# Altium PCB Port Solar Panel.PcbDoc (part 1 of 2)
Units mm, origin at the board's own origin, x right, y up, seen from the top; angles counter-clockwise.
Board outline 327.5 x 87 mm, 2 copper layers (Top Layer, Bottom Layer), stack 1.58 mm thick; 63 components, 41 nets, 237 pads, 1893 vias.
Unrouted connection lines stored in the file: 33.
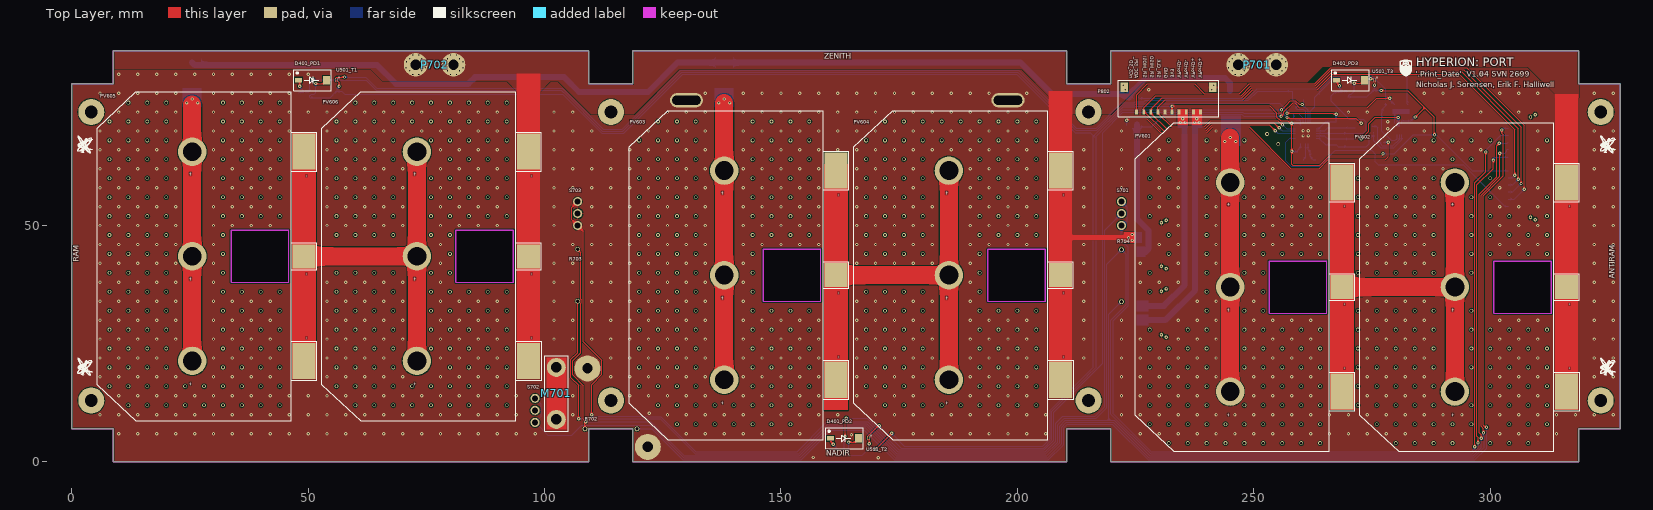
[diagram p0: Top Layer view]
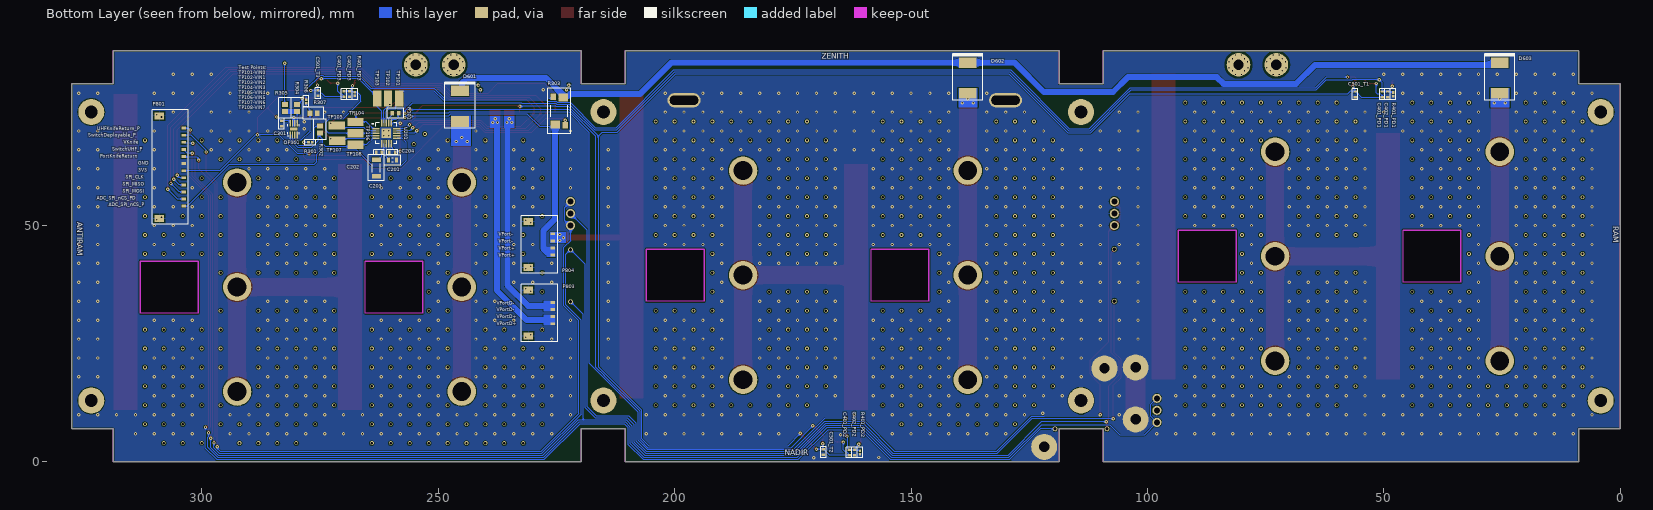
[diagram p1: Bottom Layer view, seen from below]
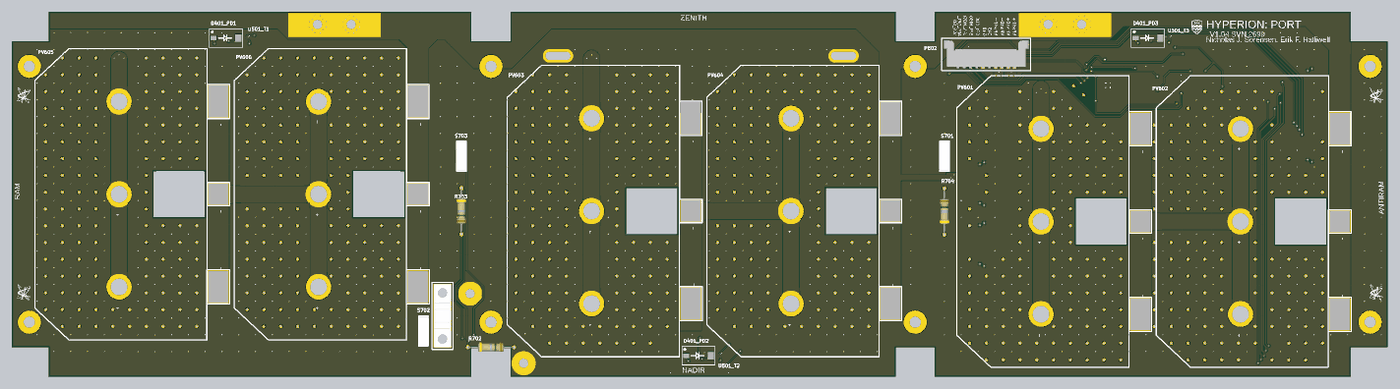
[diagram p3: 3D render of the assembled board from above, using the file's embedded part models]

## Layer stack, top to bottom
Top Solder: solder mask 0.0102, Solder Resist, Dk 3.5
Top Layer: signal copper 0.0356
Dielectric 1: dielectric 1.509, FR-4, Dk 4.8
Bottom Layer: signal copper 0.0356
Bottom Solder: solder mask 0.0102, Solder Resist, Dk 3.5

## Board outline
0,7 8.8,7 8.8,0 109.4,0 109.4,7 118.7,7 118.7,0 210.4,0 210.4,7 219.7,7 219.7,0 318.699,0 318.699,7 327.5,7 327.5,80 318.699,80 318.699,87 219.7,87 219.7,80 210.4,80 210.4,87 118.7,87 118.7,80 109.4,80 109.4,87 8.8,87 8.8,80 0,80
cut-out: 45.9,49 33.75,49 33.75,38 45.9,38
cut-out: 158.4,45 146.25,45 146.25,34 158.4,34
cut-out: 265.4,42.5 253.25,42.5 253.25,31.5 265.4,31.5
cut-out: 312.9,42.5 300.75,42.5 300.75,31.5 312.9,31.5
cut-out: 205.9,45 193.75,45 193.75,34 205.9,34
cut-out: 93.4,49 81.25,49 81.25,38 93.4,38

## Design rules (kind name [scope] priority, off if disabled: settings)
BoardOutlineClearance [All] p1: gap=0.254 ignorepadtopadclearanceinfootprint=FALSE
Clearance Clearance_1 [(InComponent('P701') OR InComponent('P702')) AND InNet('V-') vs InNet('GND')] p1: gap=0.5 ignorepadtopadclearanceinfootprint=FALSE
Clearance [All] p2: gap=0.178 ignorepadtopadclearanceinfootprint=FALSE
HoleSize [All] p1: absolutevalues=TRUE maxlimit=6 minlimit=0.2 maxpercent=80.000 minpercent=20.000
MinimumSolderMaskSliver [All] p1: minsoldermaskwidth=0.127
PlaneConnect [All] p1: planeconnectstyle=Direct reliefexpansion=0.508 reliefentries=4 reliefconductorwidth=0.254 reliefairgap=0.254
PolygonConnect [All] p1: connectstyle=Direct reliefconductorwidth=0.254 reliefentries=4 polygonreliefangle="90 Angle" airgapwidth=0.254
RoutingVias [All] p1: holewidth=0.33 width=0.711 viastyle="Through Hole" minholewidth=0.2 minwidth=0.4 maxholewidth=6 maxwidth=7
SilkToSilkClearance [All] p1: silktosilkclearance=0
SilkToSolderMaskClearance [IsPad] p1: minsilkscreentomaskgap=0.025 clearancetoexposedcopper=TRUE
SolderMaskExpansion [All] p1: expansion=0.102 istentingtop=FALSE
Width [All] p1: maxlimit=10.16 minlimit=0.203 preferedwidth=0.254
25 further rules are at their usual default settings.

## Classes and differential pairs
channel class Temp_Sensor: T1 T2 T3
channel class Photodiode_Sun_Sensor: PD1 PD2 PD3
component class T3: C501_T3 U501_T3
component class T2: C501_T2 U501_T2
component class T1: C501_T1 U501_T1
component class Port: R101 TP101 TP102 TP103 TP104 TP105 TP106 TP107 TP108
component class "Port Headers": P801 P802 P803 P804
component class PD3: C401_PD3 C402_PD3 D401_PD3 R401_PD3
component class PD2: C401_PD2 C402_PD2 D401_PD2 R401_PD2
component class PD1: C401_PD1 C402_PD1 D401_PD1 R401_PD1
component class "Mechanical Interfacing": M701 P701 P702 R702 R703 R704 S701 S702 S703
component class "Current and Voltage Sensors": C301 OP301 R301 R302 R303 R304 R305 R306 R307
component class "Photovoltaic Array": D601 D602 D603 PV601 PV602 PV603 PV604 PV605 PV606 Q101
net class VIN[0..7]: VIN0 VIN1 VIN2 VIN3 VIN4 VIN5 VIN6 VIN7
component class "U_AD7298 12-Bit SPI ADC": C201 C202 C203 C204 U201

## Components (designator, comment, footprint, x,y, rotation, side; value= is the part's Value field where it differs from the comment)
C201 "" TDK-CGA3E 259.65,63.85 r0 bottom value=1µF
C202 "" TDK-CGA2B 262.5,65.5 r0 bottom value=0.1µF
C203 "" TDK-CGA5L 263.05,62.175 r270 bottom value=10µF
C204 "" TDK-CGA2B 259.7,65.5 r0 bottom value=0.1µF
C301 "Cap" TDK-CGA2B 283.1,71.55 r90 bottom value=0.1µF
C401_PD1 "Cap" TDK-CGA2B 50.35,77.75 r270 bottom value=0.1µF (schematic designator C401)
C401_PD2 "Cap" TDK-CGA2B 163.1,2 r270 bottom value=0.1µF (schematic designator C401)
C401_PD3 "Cap" TDK-CGA2B 269.9,77.8 r270 bottom value=0.1µF (schematic designator C401)
C402_PD1 "Cap" TDK-CGA2B 49.2,77.75 r90 bottom value=100pF (schematic designator C402)
C402_PD2 "Cap" TDK-CGA2B 161.95,2 r90 bottom value=100pF (schematic designator C402)
C402_PD3 "Cap" TDK-CGA2B 268.75,77.8 r90 bottom value=100pF (schematic designator C402)
C501_T1 "Cap" TDK-CGA2B 56.1,77.75 r90 bottom value=0.1µF (schematic designator C501)
C501_T2 "Cap" TDK-CGA2B 168.55,2.1 r90 bottom value=0.1µF (schematic designator C501)
C501_T3 "Cap" TDK-CGA2B 275.4,78 r90 bottom value=0.1µF (schematic designator C501)
D401_PD1 "PDB-C160SMCT-ND" PDB-C160SM 48,80.75 r0 top (schematic designator D401)
D401_PD2 "PDB-C160SMCT-ND" PDB-C160SM 160.5,5 r0 top (schematic designator D401)
D401_PD3 "PDB-C160SMCT-ND" PDB-C160SM 267.5,80.75 r0 top (schematic designator D401)
D601 "MBRS410L" ONS-875 245.4,75.25 r90 bottom
D602 "MBRS410L" ONS-875 138,81.2 r90 bottom
D603 "MBRS410L" ONS-875 25.5,81.2 r90 bottom
M701 "Antenna_Saddle" ANTENNA_SADDLE 102.5,20 r270 top
OP301 "OPA2333" TI-DSG0008A 280.55,70.4 r90 bottom
P701 "Mounting_Hole" DEPHINGE_MOUNTING_HOLE_BODY 254.7,84 r180 top
P702 "Mounting_Hole" DEPHINGE_MOUNTING_HOLE_BODY 80.75,84 r180 top
P801 "WM16219CT-ND" MOLX-5040501291 303.8,62.35 r270 bottom
P802 "WM10138CT-ND" MOLX-5040501091 231.95,74 r180 top
P803 "WM10137CT-ND" MOLX-5040500491 225.75,31.5 r270 bottom
P804 "WM10137CT-ND" MOLX-5040500491 225.75,46 r270 bottom
PV601 "XTJPrime" "XTJ PRIME" 245,37 r270 top
PV602 "XTJPrime" "XTJ PRIME" 292.5,37 r270 top
PV603 "XTJPrime" "XTJ PRIME" 138,39.5 r270 top
PV604 "XTJPrime" "XTJ PRIME" 185.5,39.5 r270 top
PV605 "XTJPrime" "XTJ PRIME" 25.5,43.5 r270 top
PV606 "XTJPrime" "XTJ PRIME" 73,43.5 r270 top
R101 "Res3" VSH-0603MCT 259.012,73.75 r180 bottom value=10k
R301 "0.1% 1/16W" PANA-ERA2A 277.026,67.6 r180 bottom value=6.2k
R302 "0.1% 1/8W" PANA-ERA6A 274.973,70.325 r270 bottom value=1M
R303 "Res Sense" VSH-2512R4C 224.4,74.2 r270 bottom value=0.01
R304 "0.1% 1/8W" PANA-ERA6A 279.8,74.85 r270 bottom value=1M
R305 "0.1% 1/8W" PANA-ERA6A 282.4,74.85 r270 bottom value=845k
R306 "0.1% 1/16W" PANA-ERA2A 277.9,76.249 r270 bottom value=6.2k
R307 "0.1% 1/8W" PANA-ERA6A 276.337,73.75 r180 bottom value=1M
R401_PD1 "0.1% 1/16W" PANA-ERA2A 48.05,77.75 r90 bottom value=24k (schematic designator R401)
R401_PD2 "0.1% 1/16W" PANA-ERA2A 160.8,2 r90 bottom value=24k (schematic designator R401)
R401_PD3 "0.1% 1/16W" PANA-ERA2A 267.6,77.8 r90 bottom value=24k (schematic designator R401)
R702 "Res3" VSH-CPF1 119.55,7 r180 top value=21
R703 "Res3" VSH-CPF1 107,34 r90 top value=21
R704 "Res3" VSH-CPF1 222,44.9 r270 top value=21
S701 "AV4424" PANA-AV4424 222,55.08 r270 top
S702 "AV4424" PANA-AV4424 98,8.375 r90 top
S703 "AV4424" PANA-AV4424 107,55.08 r270 top
TP101 "5017" KS-5017#1 258.25,76.65 r270 bottom
TP102 "5017" KS-5017#2 260.6,76.65 r90 bottom
TP103 "5017" KS-5017#2 262.9,76.65 r90 bottom
TP104 "5017" KS-5017#3 267.45,71.9 r0 bottom
TP105 "5017" KS-5017#3 271.45,71.15 r0 bottom
TP106 "5017" KS-5017#3 267.45,69.5 r0 bottom
TP107 "5017" KS-5017#3 271.35,67.9 r0 bottom
TP108 "5017" KS-5017#3 267.45,67.1 r0 bottom
U201 "AD7298" ADI-CP-20-8 260.95,69.5 r180 bottom
U501_T1 "LMT70 / 296-47337-1-ND" TI-YFQ0004 56,80.8 r270 top (schematic designator U501)
U501_T2 "LMT70 / 296-47337-1-ND" TI-YFQ0004 168.5,5.05 r270 top (schematic designator U501)
U501_T3 "LMT70 / 296-47337-1-ND" TI-YFQ0004 275.5,80.8 r270 top (schematic designator U501)

## Footprints (in the part's own frame and the unit in brackets; to place one, negate y for a bottom-side part, rotate by r counter-clockwise, add the part's x,y. Pads: shape width x height; smd on the part's side, far side on the other; paste and mask are expansions set on the pad)
ADI-CP-20-8 [mm] "QFN, 20-Leads, Body 4.00x4.00mm, Pitch 0.50mm, Thermal Pad 2.55x2.55mm, IPC Low Density"
  rect 1.5x0.3 smd: 1(-2.2,1) 2(-2.2,0.5) 3(-2.2,0) 4(-2.2,-0.5) 5(-2.2,-1) 11(2.2,-1) 12(2.2,-0.5) 13(2.2,0) 14(2.2,0.5) 15(2.2,1)
  rect 0.3x1.5 smd: 6(-1,-2.2) 7(-0.5,-2.2) 8(0,-2.2) 9(0.5,-2.2) 10(1,-2.2) 16(1,2.2) 17(0.5,2.2) 18(0,2.2) 19(-0.5,2.2) 20(-1,2.2)
  rect 2x2 smd: 21(0,0)
  silkscreen extent -2.98,-2.2 2.2,2.2, body extent -2.07,-2.07 2.07,2.07, height 0.8
ANTENNA_SADDLE [mm] "Saddle for attaching antenna to panel"
  round 4 / inner round 4 / far side round 5.5 hole 2.2: 1(0,0) 1(11,0)
  Top Layer region: -2.125,-2.125 13.125,-2.125 13.125,2.125 -2.125,2.125
  silkscreen extent -2.5,-2.5 13.5,2.5, body extent -2,-2 13,2, height 7.29
DEPHINGE_MOUNTING_HOLE_BODY [mm]
  round 5 hole 2.2: 1(0,0) 1(8,0)
  Top Layer region: 3.2,-3.2
KS-5017#1 [mil] "Testpoint Lug Mini SMD 27X10X152"
  rect 135x70 smd: 1(-7.87,0)
  body extent -53,-20 53,20, height 60
KS-5017#2 [mil] "Testpoint Lug Mini SMD 27X10X152"
  rect 135x70 smd: 1(7.87,0)
  body extent -53,-20 53,20, height 60
KS-5017#3 [mil] "Testpoint Lug Mini SMD 27X10X152"
  rect 135x70 smd: 1(0,0)
  body extent -53,-20 53,20, height 60
MOLX-5040500491 [mm]
  rect 0.6x1 smd: 1(-2.25,0) 2(-0.75,0) 3(0.75,0) 4(2.25,0)
  oval 0.711x0.711 hole 0.33 mask+0.102: M1(-5.105,-5.7) M1(-4.605,-4.7) M2(4.605,-4.7) M2(5.105,-5.7)
  rect 1.5x2 smd: M1(-4.855,-5.2) M2(4.855,-5.2)
  silkscreen extent -6.1,-6.7 6.1,1, body extent -5.28,-6.05 5.27,0.39, height 2.01
MOLX-5040501091 [mm]
  rect 0.6x1 smd: 1(-6.75,0) 2(-5.25,0) 3(-3.75,0) 4(-2.25,0) 5(-0.75,0) 6(0.75,0) 7(2.25,0) 8(3.75,0) 9(5.25,0) 10(6.75,0)
  oval 0.711x0.711 hole 0.33 mask+0.102: M1(-9.605,-5.7) M1(-9.105,-4.7) M2(9.105,-4.7) M2(9.605,-5.7)
  rect 1.5x2 smd: M1(-9.355,-5.2) M2(9.355,-5.2)
  silkscreen extent -10.6,-6.7 10.6,1, body extent -9.78,-6.05 9.77,0.39, height 2.01
MOLX-5040501291 [mm]
  rect 0.6x1 smd: 1(-8.25,0) 2(-6.75,0) 3(-5.25,0) 4(-3.75,0) 5(-2.25,0) 6(-0.75,0) 7(0.75,0) 8(2.25,0) 9(3.75,0) 10(5.25,0) 11(6.75,0) 12(8.25,0)
  oval 0.711x0.711 hole 0.33 mask+0.102: M1(-11.105,-5.7) M1(-10.605,-4.7) M2(10.605,-4.7) M2(11.105,-5.7)
  rect 1.5x2 smd: M1(-10.855,-5.2) M2(10.855,-5.2)
  silkscreen extent -12.1,-6.7 12.1,1, body extent -11.28,-6.05 11.27,0.39, height 2.01
ONS-875 [mm]
  rect 2.25x3.79 smd: 1(-3.25,0) 2(3.25,0)
  silkscreen extent -4.7,-3.2 5.1,3.2, body extent -3.98,-2.95 3.97,2.95, height 2.32
PANA-AV4424 [mm]
  round 1.905 hole 1.27: 1(2.54,0) 2(0,0) 3(5.08,0)
  body extent -1.21,-1.25 6.29,1.25, height 5.81
PANA-ERA2A [mm] "Chip Resistor, 2-Leads, Body 1.00x0.52mm, IPC High Density"
  rect 0.548x0.5 smd: 1(-0.376,0) 2(0.376,0)
  silkscreen extent -1.15,-0.58 1.15,0.58, body extent -0.55,-0.3 0.55,0.3, height 0.4
PANA-ERA6A [mm] "Chip Resistor, 2-Leads, Body 2.00x1.25mm, IPC High Density"
  rect 1x1.25 smd: 1(-0.75,0) 2(0.75,0)
  silkscreen extent -2.15,-1.3 2.15,1.3, body extent -1.1,-0.67 1.1,0.67, height 0.6
PDB-C160SM [mm] "Photodiode"
  rect 1.45x1 smd: 1(0,0)
  rect 1.45x1.8 smd: 2(5.9,0)
  silkscreen extent -1,-2.2 6.9,2.2
TDK-CGA2B [mm] "Chip Capacitor, 2-Leads, Body 1.00x0.50mm, IPC Low Density"
  rect 0.52x0.72 smd: 1(-0.6,0) 2(0.6,0)
  silkscreen extent -1.15,-0.58 1.15,0.58, body extent -0.52,-0.28 0.53,0.27, height 0.5
TDK-CGA3E [mm] "Chip Capacitor, 2-Leads, Body 1.60x0.80mm, IPC Low Density"
  rect 0.65x1.05 smd: 1(-0.85,0) 2(0.85,0)
  silkscreen extent -1.7,-1.05 1.7,1.05, body extent -0.85,-0.45 0.85,0.45, height 0.8
TDK-CGA5L [mm] "Chip Capacitor, 2-Leads, Body 3.20x1.60mm, IPC Low Density"
  rect 0.95x1.9 smd: 1(-1.775,0) 2(1.775,0)
  silkscreen extent -2.75,-1.7 2.75,1.7, body extent -1.7,-0.9 1.7,0.9, height 1.6
TI-DSG0008A [mm] "SON, 8-Leads, Body 2.00x2.00mm, Pitch 0.50mm, Thermal Pad 1.60x0.69mm, IPC Low Density"
  rect 1.4x0.3 smd: 1(-1.245,0.75) 2(-1.245,0.25) 3(-1.245,-0.25) 4(-1.245,-0.75) 5(1.245,-0.75) 6(1.245,-0.25) 7(1.245,0.25) 8(1.245,0.75)
  rect 0.69x1.6 smd: 9(0,0)
  silkscreen extent -1.5,-1.2 1.05,1.25, body extent -1.05,-1.05 1.05,1.05, height 0.8
TI-YFQ0004 [mm] "BGA, 4-Leads, Body 0.88x0.88mmx0.68mm, Pitch 0.40mm"
  round 0.21 smd: A1(-0.2,0.2) A2(0.2,0.2) B1(-0.2,-0.2) B2(0.2,-0.2)
  silkscreen extent -0.59,0.5 -0.5,0.6, body extent -0.44,-0.44 0.44,0.44, height 0.67
VSH-0603MCT [mm] "Chip Resistor, 2-Leads, Body 1.55x0.85mm, IPC Low Density"
  rect 0.8x1.05 smd: 1(-0.7,0) 2(0.7,0)
  silkscreen extent -1.7,-1.05 1.7,1.05, body extent -0.8,-0.48 0.8,0.48, height 0.55
VSH-2512R4C [mm]
  rect 1.65x2.01 smd: 1(-2.855,0.835) 2(2.855,-0.835)
  rect 1.39x1.14 smd: 3(2.999,1.27) 4(-2.999,-1.27)
  silkscreen extent -4.8,-2.45 4.8,2.45
VSH-CPF1 [mm] "RESISTOR METAL FILM 1W 1.00K OHM"
  round 1 hole 0.7: 1(0,0) 2(11,0)
  body extent 0.25,-1.16 10.76,2.29, height 3.81
"XTJ PRIME" [mil] "Spectrolab Solar Cell"
  round 236.22 hole 157.48: 1(-870.5,0) 1(0,0) 1(870.5,0)
  rect 300x190 smd: 2(-870.5,930) 2(870.5,930)
  rect 200x190 smd: 2(0,930)
  silkscreen extent -1369,-790 1369,1038, body extent -1357,-778 1356,778, height 13

## Part data
C201: library part PC-TDK-02603, "CAP CER 1UF 25V X7R 0603", Manufacturer Part Number=CGA3E1X7R1E105K080AC, Supplier Part Number 1=445-6931-1-ND, Temperature Coefficient=X7R, Tolerance=±10%, Voltage - Rated=25V, Applications=Automotive, Index=2603, LatestRevisionDate=3/16/2016, LatestRevisionNote=..., PackageReference="0603 (1608 Metric)", Part Number=PC-TDK-02603, Published=3/16/2016, Publisher=AlbertaSat, Supplier 1=Digi-key, Supplier Link=http://www.digikey.ca/product-search/en?keywords=445-6931-1-ND
C202 C204 C401_PD1 C401_PD2 C401_PD3 C501_T1 C501_T2 C501_T3: library part PC-TDK-02259, "CAP CER 0.1UF 50V X7R 0402", Manufacturer Part Number=CGA2B3X7R1H104K050BB, Supplier Part Number 1=445-6899-1-ND, Temperature Coefficient=X7R, Tolerance=±10%, Voltage - Rated=50V, Applications=Automotive, Index=2259, LatestRevisionNote=..., PackageReference="0402 (1005 Metric)", Part Number=PC-TDK-02259, Publisher=AlbertaSat, Supplier 1=Digi-key, Supplier Link=http://www.digikey.ca/product-search/en?keywords=445-6899-1-ND
  C202 C204: LatestRevisionDate=3/16/2016, Published=3/16/2016
  C401_PD1 C401_PD2 C401_PD3 C501_T1 C501_T2 C501_T3: LatestRevisionDate=2016-03-16, PackageDescription="Radial Cap, Thru-Hole; 2 Leads; 0.3 in Pin Spacing", Published=2016-03-16
C203: library part PC-TDK-02917, "CAP CER 10UF 25V X7R 1206", Manufacturer Part Number=CGA5L1X7R1E106K160AC, Supplier Part Number 1=445-6990-1-ND, Temperature Coefficient=X7R, Tolerance=±10%, Voltage - Rated=25V, Applications=Automotive, Index=2917, LatestRevisionDate=3/16/2016, LatestRevisionNote=..., PackageReference="1206 (3216 Metric)", Part Number=PC-TDK-02917, Published=3/16/2016, Publisher=AlbertaSat, Supplier 1=Digi-key, Supplier Link=http://www.digikey.ca/product-search/en?keywords=445-6990-1-ND
C301: library part PC-TDK-02255, "CAP CER 0.1UF 35V X7R 0402", Manufacturer Part Number=CGA2B3X7R1V104K050BB, Supplier Part Number 1=445-6901-1-ND, Temperature Coefficient=X7R, Tolerance=±10%, Voltage - Rated=35V, Applications=Automotive, Index=2255, LatestRevisionDate=2016-03-16, LatestRevisionNote=..., PackageDescription="Radial Cap, Thru-Hole; 2 Leads; 0.3 in Pin Spacing", PackageReference="0402 (1005 Metric)", Part Number=PC-TDK-02255, Published=2016-03-16, Publisher=AlbertaSat, Supplier 1=Digi-key, Supplier Link=http://www.digikey.ca/product-search/en?keywords=445-6901-1-ND
C402_PD1 C402_PD2 C402_PD3: library part PC-TDK-01227, "CAP CER 100PF 50V C0G 0402", Manufacturer Part Number=CGA2B2C0G1H101J050BA, Supplier Part Number 1=445-5596-1-ND, Temperature Coefficient=NP0, Tolerance=±5%, Voltage - Rated=50V, Applications=Automotive, Index=1227, LatestRevisionDate=2016-03-16, LatestRevisionNote=..., PackageDescription="Radial Cap, Thru-Hole; 2 Leads; 0.3 in Pin Spacing", PackageReference="0402 (1005 Metric)", Part Number=PC-TDK-01227, Published=2016-03-16, Publisher=AlbertaSat, Supplier 1=Digi-key, Supplier Link=http://www.digikey.ca/product-search/en?keywords=445-5596-1-ND
D401_PD1 D401_PD2 D401_PD3: library part PXX-ADP-00000, "SENSOR PHOTODIODE 850NM 2SMD GW", Manufacturer Part Number="Advanced Photonics", Index=1, LatestRevisionDate=3/28/2020, LatestRevisionNote=..., PackageReference=PIN2, Part Number=PXX-ADP-00000, Published=3/28/2020, Publisher=AlbertaSat, Supplier 1=Digi-key, Supplier Part Number 1=PDB-C160SMCT-ND
D601 D602 D603: library part PXX-ONS-00003, "SCHOTTKY BARRIER / RECTIFIERS / 4.0 AMPERES, 10 VOLTS, V_F = 0.31V", Supplier Part Number 1=MBRS410LT3-D, Code_JEDEC=DO-214-AA, Index=3, LatestRevisionDate=1/18/2020, LatestRevisionNote=..., Manufacturer Part Number=MBRS410L, PackageDescription="DO-214-AA/SMB; 2 C-Bend Leads; Body 5.3 x 3.6 mm, inc. leads (LxW)", PackageReference=SMB, Part Number=PXX-ONS-00003, Published=1/18/2020, Publisher=AlbertaSat, Supplier 1=Digi-key, Supplier Link=#https://www.digikey.com/product-detail/en/on-semiconductor/MBRS410LT3G/MBRS410LT3GOSCT-ND/1967073#
M701: library part PXX-ABS-00001, Manufacturer Part Number=Custom, Index=1, LatestRevisionNote=..., Part Number=PXX-ABS-00001, Publisher=AlbertaSat, Supplier 1=Digi-key
OP301: library part 73, "CMOS Amplifier 2 Circuit Rail-to-Rail 8-WSON (2x2)", Manufacturer Part Number=OPA2333PIDSGR, Operating Temperature="-55°C ~ 150°C", Supplier Part Number 1=296-51501-1-ND, Voltage - Supply="1.8V ~ 5.5V, ±0.9V ~ 2.75V", PackageReference="8-WFDFN Exposed Pad", Part Number=73, Supplier 1=Digi-Key, Supplier 2=Mouser, Supplier Link=#https://www.digikey.ca/product-detail/en/texas-instruments/OPA2333PIDSGR/296-51501-1-ND/9745865#, Supplier Part Number 2=595-OPA2333PIDSGR
P701 P702: library part PXX-ABS-00004, Manufacturer Part Number=Custom, Index=4, LatestRevisionNote=..., Part Number=PXX-ABS-00004, Publisher=AlbertaSat, Supplier 1=Digi-key
P801: library part 71, "CONN HEADER SMD R/A 12POS 1.5MM", Manufacturer Part Number=5040501291, LatestRevisionDate=17-Jul-2002, LatestRevisionNote="Re-released for DXP Platform.", Part Number=71, Publisher="Altium Limited", Supplier 1=Digi-Key, Supplier Link=#https://www.digikey.ca/product-detail/en/molex/5040501291/WM16219CT-ND/6702294#, Supplier Part Number 1=WM16219CT-ND
P802: library part 69, "CONN HEADER SMD R/A 10POS 1.5MM", Manufacturer Part Number=5040501091, LatestRevisionDate=17-Jul-2002, LatestRevisionNote="Re-released for DXP Platform.", Part Number=69, Publisher="Altium Limited", Supplier 1=Digi-Key, Supplier Link=#https://www.digikey.ca/product-detail/en/molex/5040501091/WM10138CT-ND/4357655#, Supplier Part Number 1=WM10138CT-ND
P803 P804: library part 63, "CONN HEADER SMD R/A 4POS 1.5MM", Manufacturer Part Number=5040500491, LatestRevisionDate=17-Jul-2002, LatestRevisionNote="Re-released for DXP Platform.", Part Number=63, Publisher="Altium Limited", Supplier 1=Digi-Key, Supplier Link=#https://www.digikey.ca/product-detail/en/molex/5040500491/WM10137CT-ND/4357653#, Supplier Part Number 1=WM10137CT-ND
PV601 PV602 PV603 PV604 PV605 PV606: library part PBT-SPEC-00002, Manufacturer Part Number=Spectrolab, Supplier Part Number 1="UTJ CIC 26.26cm^2", Index=2, LatestRevisionNote=..., PackageReference="3-Connector Solar Cell", Part Number=PBT-SPEC-00002, Publisher=AlbertaSat, Supplier 1=Spectrolab
R101: library part PR-VSH-00143, "RES SMD 10K OHM 1% 1/8W 0603", Manufacturer Part Number=MCT06030C1002FP500, Power - Rated=1/8W, Supplier Part Number 1=MCT0603-10.0K-CFCT-ND, Temperature Coefficient=±50ppm/°C, Tolerance=±1%, Applications="General Purpose", Index=143, LatestRevisionDate=3/14/2016, LatestRevisionNote=..., PackageDescription="Chip Resistor, 2-Leads, Body 1.55x0.85mm, IPC Low Density", PackageReference="0603 (1608 Metric)", Part Number=PR-VSH-00143, Published=3/14/2016, Publisher=AlbertaSat, Supplier 1=Digi-key, Supplier Link=http://www.digikey.ca/product-search/en?keywords=MCT0603-10.0K-CFCT-ND
R301 R306: library part 16853, "RES SMD 6.2K OHM 0.1% 1/16W 0402", Manufacturer Part Number=ERA-2APB622X, Power="0.063W, 1/16W", Supplier Part Number 1=P6.2KCNCT-ND, Temperature Coefficient=±15ppm/°C, Tolerance=±0.1%, LatestRevisionDate=29-May-2009, LatestRevisionNote="IPC-7351 Footprint Added.", PackageDescription="Chip Resistor, 2-Leads, Body 1.00x0.50mm, IPC Low Density", PackageReference="0402 (1005 Metric)", Part Number=16853, Published=8-Jun-2000, Publisher="Altium Limited", Supplier 1=Digi-Key, Supplier Link=http://www.digikey.ca/product-search/en?keywords=P6.2KCNCT-ND
R302 R304 R307: library part 19706, "RES SMD 1M OHM 0.1% 1/8W 0805", Manufacturer Part Number=ERA-6AEB105V, Power="0.125W, 1/8W", Supplier Part Number 1=P1MDACT-ND, Temperature Coefficient=±25ppm/°C, Tolerance=±0.1%, LatestRevisionDate=29-May-2009, LatestRevisionNote="IPC-7351 Footprint Added.", PackageDescription="Chip Resistor, 2-Leads, Body 2.00x1.25mm, IPC Low Density", PackageReference="0805 (2012 Metric)", Part Number=19706, Published=8-Jun-2000, Publisher="Altium Limited", Supplier 1=Digi-Key, Supplier Link=http://www.digikey.ca/product-search/en?keywords=P1MDACT-ND
R303: library part PR-VSH-00237, "RES SMD 0.01 OHM 0.1% 1W 2512", Manufacturer Part Number=Y14870R01000B9W, Power - Rated=1W, Supplier Part Number 1=Y1487-.01-ND, Temperature Coefficient=±15ppm/°C, Tolerance=±0.1%, Applications=Automotive, Index=237, LatestRevisionDate=2017-07-12, LatestRevisionNote=..., PackageReference=VSH-2512R4C, Part Number=PR-VSH-00237, Published=2017-07-12, Publisher=AlbertaSat, Supplier 1=Digi-key, Supplier Link=http://www.digikey.ca/product-search/en?keywords=Y1487-.01-ND
R305: library part 19643, "RES SMD 845K OHM 0.1% 1/8W 0805", Manufacturer Part Number=ERA-6AEB8453V, Power="0.125W, 1/8W", Supplier Part Number 1=P845KDACT-ND, Temperature Coefficient=±25ppm/°C, Tolerance=±0.1%, LatestRevisionDate=29-May-2009, LatestRevisionNote="IPC-7351 Footprint Added.", PackageDescription="Chip Resistor, 2-Leads, Body 2.00x1.25mm, IPC Low Density", PackageReference="0805 (2012 Metric)", Part Number=19643, Published=8-Jun-2000, Publisher="Altium Limited", Supplier 1=Digi-Key, Supplier Link=http://www.digikey.ca/product-search/en?keywords=P845KDACT-ND
R401_PD1 R401_PD2 R401_PD3: library part 17830, "RES SMD 24K OHM 0.1% 1/16W 0402", Manufacturer Part Number=ERA-2APB243X, Power="0.063W, 1/16W", Supplier Part Number 1=P24KCNCT-ND, Temperature Coefficient=±15ppm/°C, Tolerance=±0.1%, LatestRevisionDate=29-May-2009, LatestRevisionNote="IPC-7351 Footprint Added.", PackageDescription="Chip Resistor, 2-Leads, Body 1.00x0.50mm, IPC Low Density", PackageReference="0402 (1005 Metric)", Part Number=17830, Published=8-Jun-2000, Publisher="Altium Limited", Supplier 1=Digi-Key, Supplier Link=http://www.digikey.ca/product-search/en?keywords=P24KCNCT-ND
R702 R703 R704: library part PR-VSH-00317, "21 Ohms ±1% 1W Through Hole Resistor Axial Flame Proof, Moisture Resistant, Safety Metal Film", Manufacturer Part Number=CPF121R000FKEE6, Power - Rated=1W, Supplier Part Number 1=CPF21.0CCT-ND, Temperature Coefficient=±100ppm/°C, Tolerance=±1%, Index=317, LatestRevisionDate=2/27/2020, LatestRevisionNote=..., PackageDescription="Chip Resistor", PackageReference=VSH-CPF1, Part Number=PR-VSH-00317, Published=2/27/2020, Publisher=AlbertaSat, Supplier 1=Digi-key, Supplier Link=#https://www.digikey.ca/product-detail/en/vishay-dale/CPF121R000FKEE6/CPF21.0CCT-ND/2713126#
S701 S702 S703: library part 20035, "SWITCH SNAP ACT SPDT 500MA 30V", Supplier Part Number 1=255-3743-ND, Manufacturer Part Number=AV4424, Part Number=20035, Supplier 1=Digi-Key, Supplier Link=#https://www.digikey.com/product-detail/en/panasonic-electric-works/AV4424/255-3743-ND/646766#
TP101 TP102 TP103 TP104 TP105 TP106 TP107 TP108: library part PTP-KS-00001, "PC TEST POINT MINI SMD", Supplier Part Number 1=36-5017CT-ND, Index=1, LatestRevisionDate=3/15/2016, LatestRevisionNote=..., Manufacturer Part Number=5017, PackageDescription="Testpoint Lug Mini SMD 27X10X152", PackageReference=KS-5017, Part Number=PTP-KS-00001, Published=3/15/2016, Publisher=AlbertaSat, Supplier 1=Digi-key, Supplier 2=Newark, Supplier 3=Mouser, Supplier Link=http://www.digikey.ca/product-detail/en/keystone-electronics/5017/36-5017TR-ND/2217304
U201: library part PU-ADI-00007, "IC ADC 12BIT SAR 20LFCSP-WQ", Manufacturer Part Number=AD7298BCPZ, Supplier Part Number 1=AD7298BCPZ-ND, Index=7, LatestRevisionDate=7/16/2019, LatestRevisionNote=..., PackageDescription="QFN, 20-Leads, Body 4.00x4.00mm, Pitch 0.50mm, Thermal Pad 2.55x2.55mm, IPC Low Density", PackageReference="20-WFQFN Exposed Pad", Part Number=PU-ADI-00007, Published=7/16/2019, Publisher=AlbertaSat, Supplier 1=Digi-key, Supplier 2=Mouser, Supplier Link=#https://www.digikey.ca/product-detail/en/analog-devices-inc/AD7298BCPZ/AD7298BCPZ-ND/2507320#, Supplier Part Number 2=584-AD7298BCPZ
U501_T1 U501_T2 U501_T3: library part 70, "Temperature Sensor Analog, Local -55°C ~ 150°C 5.194mV/°C 4-DSBGA (0.81x0.81)", Manufacturer Part Number=LMT70YFQR, Operating Temperature="-55°C ~ 150°C", Supplier Part Number 1=296-47337-1-ND, PackageReference="BGA, 4-Leads, Body 0.88x0.88mmx0.68mm, Pitch 0.40mm", Part Number=70, Supplier 1=Digi-Key, Supplier Link=#https://www.digikey.ca/product-detail/en/texas-instruments/LMT70YFQR/296-47337-1-ND/7688347#

## Free pads (board coordinates)
  round 5.5 hole 2.2: 3(109.089,19.8) 3(121.838,3.2)
  oval 7x3 hole 2 slot 6 at 0 deg: 5(130,76.5) 5(198,76.5)
  round 5.5 hole 2.7: CHASSIS(4.15,13) CHASSIS(4.15,74) CHASSIS(114.05,13) CHASSIS(114.05,74) CHASSIS(215.05,13) CHASSIS(215.05,74) CHASSIS(323.35,13) CHASSIS(323.35,74)

## Via types
v1: diameter 0.711, hole 0.3, Top Layer to Bottom Layer, tented both sides, 1084 vias
v2: diameter 0.8, hole 0.5, Top Layer to Bottom Layer, 761 vias
v3: diameter 0.655, hole 0.25, Top Layer to Bottom Layer, 48 vias

## Nets (pads, with @x,y where several pads share a name; then routed paths per layer and width w, separated by ;. In a path a pad name is that pad's centre, name@x,y a point inside that pad or via, vN(x,y) a via of type N, cw(c..) or ccw(c..) an arc to the next point about the centre after c; other vN are vias at no path point)
3V3: C204.1 C301.2 C401_PD1.2 C401_PD2.2 C401_PD3.2 C501_T1.2 C501_T2.2 C501_T3.2 D401_PD1.2 D401_PD2.2 D401_PD3.2 OP301.8 P801.7 P802.5 R101.2 U201.10 U201.16 U501_T1.A2 U501_T1.B2 U501_T2.A2 U501_T2.B2 U501_T3.A2 U501_T3.B2 | length 471.6
  Top Layer w0.203: U501_T1.B2@55.8,80.6 U501_T1.A2@56.2,80.6 ; U501_T1.A2@56.2,80.59 56.55,80.24 v1(56.55,79.45) ; U501_T2.B2@168.3,4.85 U501_T2.A2@168.7,4.85 U501_T2.A2@168.7,4.85 168.699,3.899 v1(168.65,3.85) ; v1(271.2,80.1) 272.777,80.1 273.4,80.723 D401_PD3.2@273.4,80.75 ; U501_T3.B2@275.3,80.6 U501_T3.A2@275.7,80.6 275.7,79.987 275.5,79.787 v1(275.5,79.65)
  Top Layer w0.254: v1(51.6,80.05) 51.673,79.977 53.302,79.977 53.9,80.575 D401_PD1.2@53.9,80.75 ; v1(164.3,4.217) 164.31,4.227 165.802,4.227 166.4,4.825 D401_PD2.2@166.4,5 ; v1(170,2.7) 170.05,2.7 v1(173.4,6.05) ; P802.5@232.7,74 v1(232.7,75.2) ; v1(258,71.6) v1@258,71.55 ; v1(276.9,78.55) 282.55,78.55 286.15,74.95 ; v1(277.3,65.2) 277.3,65.076 277.133,64.909 277.133,64.833 277.05,64.75 265.925,64.75 263.975,62.8 258.199,62.8 258.05,62.949 v1(258.05,65.75) 257.9,65.9 258,66 v1@258,71.55 ; v1(284.15,72.95) 286.15,74.95 ; v1(288.2,69.213) 288.15,69.263 288.15,72.95 286.15,74.95 ; v1(232.7,75.2) 232.7,75.3 v1(232.7,75.2) ; v1(232.7,75.2) 232.8,75.3 253.35,75.3 254.85,73.8 254.85,72.95 255.168,72.632 255.284,72.632 255.726,72.19 257.16,72.19 257.8,71.55 v1@258,71.55
  Bottom Layer w0.203: C501_T2.2@168.55,2.7 168.65,2.8 v1(168.65,3.85)
  Bottom Layer w0.254: v1(51.6,80.05) 51.6,78.126 51.259,77.785 50.635,77.785 50.4,77.55 50.4,77.2 C401_PD1.2@50.35,77.15 50.45,77.05 54.7,77.05 56,78.35 C501_T1.2@56.1,78.35 ; v1(56.55,79.45) 56.55,79.326 56.215,78.991 56.215,78.465 C501_T1.2@56.1,78.35 ; C401_PD2.2@163.1,1.4 C401_PD2.2@163.117,1.4 ; v1(164.3,4.217) 164.3,2.55 163.785,2.035 163.485,2.035 163.25,1.8 163.25,1.533 C401_PD2.2@163.117,1.4 ; v1(170,2.7) C501_T2.2@168.55,2.7 168.45,2.7 167.15,1.4 C401_PD2.2@163.117,1.4 ; v1(173.4,6.05) 176.097,3.353 205.346,3.353 206.894,4.9 206.894,10.912 214.974,18.992 214.978,18.992 cw(c218.476,15.257) 215.12,19.121 215.127,19.127 216.077,20.077 216.077,68.846 ; v1(232.7,75.2) 225.321,75.2 225.221,75.3 225.033,75.112 222.343,75.112 216.077,68.846 ; v1(258,71.6) 259.648,71.6 259.948,71.3 259.95,71.302 U201.16@259.95,71.7 259.95,72.3 259.927,72.323 258.977,72.323 258.457,72.843 258.457,73.41 R101.2@258.267,73.6 ; v1(258.05,65.75) 258.137,65.663 258.967,65.663 259.1,65.53 C204.1@259.1,65.5 259.233,65.633 259.233,65.962 259.95,66.679 U201.10@259.95,67.3 ; v1(271.2,80.1) 271.2,78.45 270.562,77.812 270.262,77.812 270.05,77.6 270.05,77.35 C401_PD3.2@269.9,77.2 273.9,77.2 275.3,78.6 C501_T3.2@275.4,78.6 ; v1(275.5,79.65) 275.5,78.7 C501_T3.2@275.4,78.6 ; v1(276.9,78.55) 276.875,78.575 275.425,78.575 C501_T3.2@275.4,78.6 ; v1(277.3,65.2) 279.713,65.2 283.726,69.213 v1(288.2,69.213) 288.571,69.213 296.184,61.6 P801.7@303.8,61.6 ; OP301.8@281.3,71.645 281.3,72.148 281.302,72.15 C301.2@283.1,72.15 283.2,72.15 283.913,72.863 284.063,72.863 v1(284.15,72.95) ; C501_T1.2@56.1,78.35 56.215,78.35 57.135,78.35 57.736,77.749 103.865,77.749 112.053,69.562 116.747,69.562 129.185,82 199.889,82 212.233,69.656 215.368,69.656 216.077,68.947 216.077,68.846
ADC_SPI_nCS_P: P801.12 U201.11 | length 61.1
  Bottom Layer w0.254: U201.11@258.75,68.5 257.619,68.5 256.732,67.613 256.732,63.718 257.95,62.5 263.8,62.5 267.206,65.906 274.894,65.906 275.7,65.1 275.7,63.5 276.337,62.863 294.31,62.863 303.073,54.1 P801.12@303.8,54.1
ADC_SPI_nCS_PD: P801.11 P802.10 | length 112.5
  Top Layer w0.254: P802.10@225.2,74 225.2,77.7 227.487,79.987 237.451,79.987 239.545,77.894 246.911,77.894 249.005,79.987 262.858,79.987 266.224,83.353 295.007,83.353 307.16,71.2 v1(307.16,57.7)
  Bottom Layer w0.254: P801.11@303.8,55.6 305.06,55.6 v1(307.16,57.7)